# Altium PCB DS214SD.PcbDoc (part 2 of 2)
Units mm, origin at the board's own origin, x right, y up, seen from the top; angles counter-clockwise.
Board outline 549.66 x 200.53 mm, 2 copper layers (Top Layer, Bottom Layer); 205 components, 121 nets, 619 pads, 83 vias.
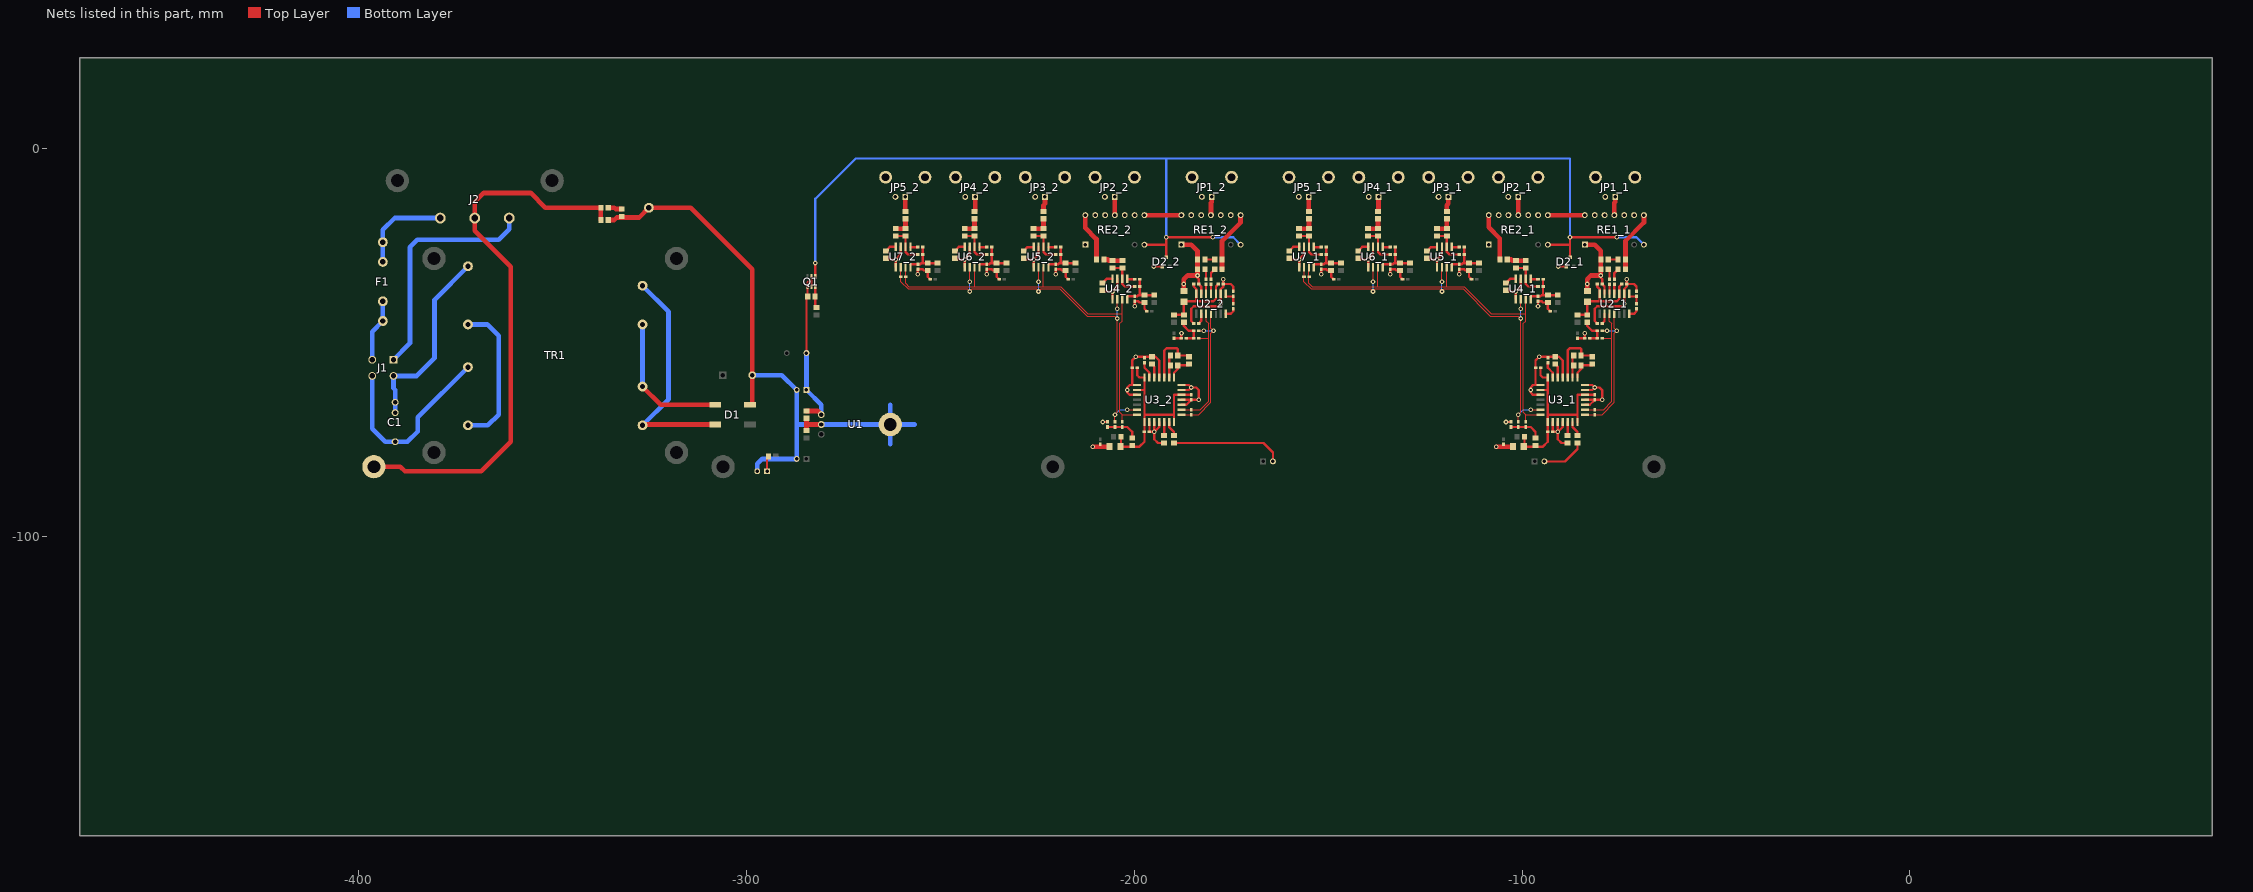
[diagram p2: the nets of this part, all layers, seen from the top]

## Via types
v1: diameter 1.2, hole 0.6, Top Layer to Bottom Layer, 83 vias

## Nets (pads, with @x,y where several pads share a name; then routed paths per layer and width w, separated by ;. In a path a pad name is that pad's centre, name@x,y a point inside that pad or via, vN(x,y) a via of type N, cw(c..) or ccw(c..) an arc to the next point about the centre after c; other vN are vias at no path point) (continued)
GND: C3.1 C4.1 C5.2 C6.2 C7.2 C8_1.1 C8_2.1 C9_1.1 C9_2.1 C11_1.1 C11_2.1 C12_1.1 C12_2.1 C13_1.1 C13_2.1 C14_1.1 C14_2.1 C15_1.1 C15_2.1 C16_1.1 C16_2.1 C17_1.1 C17_2.1 C18_1.1 C18_2.1 C19_1.1 C19_2.1 C20_1.1 C20_2.1 C21_1.1 C21_2.1 C22_1.1 C22_2.1 C23_1.1 C23_2.1 C24_1.1 C24_2.1 C25_1.1 C25_2.1 C26_1.1 C26_2.1 C27_1.1 C27_2.1 C28_1.1 C28_2.1 C32_1.2 C32_2.2 C33_1.2 C33_2.2 C35_1.1 C35_2.1 C36_1.1 C36_2.1 C37_1.1 C37_2.1 C38_1.1 C38_2.1 D1.2 D2_1.2 D2_2.2 J3.2 JP1_1.2 JP1_1.3 JP1_1.4 JP1_2.2 JP1_2.3 JP1_2.4 JP2_1.2 JP2_1.3 JP2_1.4 JP2_2.2 JP2_2.3 JP2_2.4 JP3_1.2 JP3_1.3 JP3_1.4 JP3_2.2 JP3_2.3 JP3_2.4 JP4_1.2 JP4_1.3 JP4_1.4 JP4_2.2 JP4_2.3 JP4_2.4 JP5_1.2 JP5_1.3 JP5_1.4 JP5_2.2 JP5_2.3 JP5_2.4 L2_1.2 L2_2.2 pad.1 R1.1 R2.1 R14_1.2 R14_2.2 R15_1.2 R15_2.2 R16_1.1 R16_2.1 R29_1.1 R29_2.1 R30_1.1 R30_2.1 R31_1.1 R31_2.1 R32_1.1 R32_2.1 RE1_1.1 RE1_1.9 RE1_1.10 RE1_1.12 RE1_1.13 RE1_2.1 RE1_2.9 RE1_2.10 RE1_2.12 RE1_2.13 RE2_1.1 RE2_1.9 RE2_1.10 RE2_1.12 RE2_1.13 RE2_2.1 RE2_2.9 RE2_2.10 RE2_2.12 RE2_2.13 U1.2 U1.4 U2_1.2 U2_1.6 U2_2.2 U2_2.6 U3_1.1 U3_1.7 U3_1.8 U3_1.10 U3_1.11 U3_1.15 U3_1.19 U3_1.21 U3_1.27 U3_1.28 U3_2.1 U3_2.7 U3_2.8 U3_2.10 U3_2.11 U3_2.15 U3_2.19 U3_2.21 U3_2.27 U3_2.28 U4_1.3 U4_1.5 U4_2.3 U4_2.5 U5_1.3 U5_1.5 U5_2.3 U5_2.5 U6_1.3 U6_1.5 U6_2.3 U6_2.5 U7_1.3 U7_1.5 U7_2.3 U7_2.5 | length 516.5
  Top Layer w0.6: R32_2.1@-264.02,-28.575 v1(-261.48,-28.575) ; U7_2.5@-261.48,-30.54 v1(-261.48,-28.575) ; U7_2.3@-260.21,-25.34 -260.21,-27.305 v1(-261.48,-28.575) ; v1(-255.765,-32.385) C23_2.1@-255.765,-31.13 -254.51,-31.13 -254.21,-31.43 C38_2.1@-253.225,-31.43 -253.225,-33.035 C27_2.1@-252.605,-33.655 ; R31_2.1@-246.24,-28.575 v1(-243.7,-28.575) ; U6_2.5@-243.7,-30.54 v1(-243.7,-28.575) ; U6_2.3@-242.43,-25.34 -242.43,-27.305 v1(-243.7,-28.575) ; v1(-237.985,-32.385) C22_2.1@-237.985,-31.13 -236.73,-31.13 -236.43,-31.43 C37_2.1@-235.445,-31.43 -235.445,-33.035 C26_2.1@-234.825,-33.655 ; R30_2.1@-228.46,-28.575 v1(-225.92,-28.575) ; U5_2.5@-225.92,-30.54 v1(-225.92,-28.575) ; U5_2.3@-224.65,-25.34 -224.65,-27.305 v1(-225.92,-28.575) ; v1(-220.205,-32.385) C21_2.1@-220.205,-31.13 -218.95,-31.13 -218.65,-31.43 C36_2.1@-217.665,-31.43 -217.665,-33.035 C25_2.1@-217.045,-33.655 ; v1(-208.14,-70.485) -208.125,-70.47 C16_2.1@-206.87,-70.47 ; R29_2.1@-208.14,-36.83 v1(-205.6,-36.83) ; U4_2.5@-205.6,-38.795 v1(-205.6,-36.83) ; U4_2.3@-204.33,-33.595 -204.33,-35.56 v1(-205.6,-36.83) ; -200.535,-60.945 -200.535,-54.625 v1(-199.57,-53.66) -194.485,-53.66 -193.535,-54.61 U3_2.15@-193.535,-59.02 ; v1(-199.885,-40.64) C20_2.1@-199.885,-39.385 -198.915,-39.385 -198.615,-39.685 C35_2.1@-197.345,-39.685 -197.345,-41.275 C24_2.1@-196.71,-41.91 ; U3_2.21@-199.285,-63.5 -201.155,-63.5 -201.79,-62.865 -201.79,-61.595 -201.155,-60.96 U3_2.19@-199.285,-60.96 ; U3_2.27@-196.06,-70.535 C18_2.1@-196.06,-73.025 v1(-194.805,-73.025) -193.535,-71.755 U3_2.1@-193.535,-70.52 ; v1(-194.945,-30.385) D2_2.2@-192.72,-30.385 ; U3_2.28@-194.805,-70.52 -194.805,-74.93 -193.855,-75.88 C28_2.1@-192.265,-75.88 ; C8_2.1@-189.71,-48.895 C14_2.1@-187.835,-48.895 -187.835,-47.64 v1(-187.82,-47.625) ; U3_2.7@-187.785,-66.04 -186.535,-66.04 C17_2.1@-185.28,-64.785 -183.39,-64.785 v1(-183.375,-64.77) -183.375,-62.23 -184.01,-61.595 v1(-185.28,-61.595) ; U3_2.8@-187.785,-64.77 C17_2.1@-185.295,-64.77 ; U3_2.10@-187.785,-62.23 -185.915,-62.23 v1(-185.28,-61.595) ; U3_2.11@-187.785,-60.96 -185.915,-60.96 v1(-185.28,-61.595) ; R16_2.1@-184.66,-45.085 -185.28,-44.465 -185.28,-41.275 -184.645,-40.64 -178.295,-40.64 v1(-177.66,-40.005) -177.66,-36.195 -177.01,-35.545 -177.01,-33.67 v1(-177.025,-33.655) ; v1(-183.69,-32.705) -183.69,-33.34 -183.36,-33.67 C11_2.1@-183.36,-34.925 -182.74,-35.545 U2_2.6@-182.74,-37.405 ; C12_2.1@-177.01,-34.925 -175.12,-34.925 -174.485,-35.56 C9_2.1@-174.485,-36.815 ; R32_1.1@-160.02,-28.575 v1(-157.48,-28.575) ; U7_1.5@-157.48,-30.54 v1(-157.48,-28.575) ; U7_1.3@-156.21,-25.34 -156.21,-27.305 v1(-157.48,-28.575) ; v1(-151.765,-32.385) C23_1.1@-151.765,-31.13 -150.51,-31.13 -150.21,-31.43 C38_1.1@-149.225,-31.43 -149.225,-33.035 C27_1.1@-148.605,-33.655 ; R31_1.1@-142.24,-28.575 v1(-139.7,-28.575) ; U6_1.5@-139.7,-30.54 v1(-139.7,-28.575) ; U6_1.3@-138.43,-25.34 -138.43,-27.305 v1(-139.7,-28.575) ; v1(-133.985,-32.385) C22_1.1@-133.985,-31.13 -132.73,-31.13 -132.43,-31.43 C37_1.1@-131.445,-31.43 -131.445,-33.035 C26_1.1@-130.825,-33.655 ; R30_1.1@-124.46,-28.575 v1(-121.92,-28.575) ; U5_1.5@-121.92,-30.54 v1(-121.92,-28.575) ; U5_1.3@-120.65,-25.34 -120.65,-27.305 v1(-121.92,-28.575) ; v1(-116.205,-32.385) C21_1.1@-116.205,-31.13 -114.95,-31.13 -114.65,-31.43 C36_1.1@-113.665,-31.43 -113.665,-33.035 C25_1.1@-113.045,-33.655 ; v1(-104.14,-70.485) -104.125,-70.47 C16_1.1@-102.87,-70.47 ; R29_1.1@-104.14,-36.83 v1(-101.6,-36.83) ; U4_1.5@-101.6,-38.795 v1(-101.6,-36.83) ; U4_1.3@-100.33,-33.595 -100.33,-35.56 v1(-101.6,-36.83) ; -96.535,-60.945 -96.535,-54.625 v1(-95.57,-53.66) -90.485,-53.66 -89.535,-54.61 U3_1.15@-89.535,-59.02 ; v1(-95.885,-40.64) C20_1.1@-95.885,-39.385 -94.915,-39.385 -94.615,-39.685 C35_1.1@-93.345,-39.685 -93.345,-41.275 C24_1.1@-92.71,-41.91 ; U3_1.21@-95.285,-63.5 -97.155,-63.5 -97.79,-62.865 -97.79,-61.595 -97.155,-60.96 U3_1.19@-95.285,-60.96 ; U3_1.27@-92.06,-70.535 C18_1.1@-92.06,-73.025 v1(-90.805,-73.025) -89.535,-71.755 U3_1.1@-89.535,-70.52 ; U3_1.28@-90.805,-70.52 -90.805,-74.93 -89.855,-75.88 C28_1.1@-88.265,-75.88 ; v1(-90.71,-30.385) D2_1.2@-88.58,-30.385 ; C8_1.1@-85.71,-48.895 C14_1.1@-83.835,-48.895 -83.835,-47.64 v1(-83.82,-47.625) ; U3_1.7@-83.785,-66.04 -82.535,-66.04 C17_1.1@-81.28,-64.785 -79.39,-64.785 v1(-79.375,-64.77) -79.375,-62.23 -80.01,-61.595 v1(-81.28,-61.595) ; U3_1.8@-83.785,-64.77 C17_1.1@-81.295,-64.77 ; U3_1.10@-83.785,-62.23 -81.915,-62.23 v1(-81.28,-61.595) ; U3_1.11@-83.785,-60.96 -81.915,-60.96 v1(-81.28,-61.595) ; R16_1.1@-80.66,-45.085 -81.28,-44.465 -81.28,-41.275 -80.645,-40.64 -74.295,-40.64 v1(-73.66,-40.005) -73.66,-36.195 -73.01,-35.545 -73.01,-33.67 v1(-73.025,-33.655) ; v1(-79.69,-32.705) -79.69,-33.34 -79.36,-33.67 C11_1.1@-79.36,-34.925 -78.74,-35.545 U2_1.6@-78.74,-37.405 ; C12_1.1@-73.01,-34.925 -71.12,-34.925 -70.485,-35.56 C9_1.1@-70.485,-36.815
  Top Layer w1.2: R1.1@-335.6,-18.415 -334.01,-18.415 -333.375,-17.78 -327.66,-17.78 pad.1@-325.12,-15.24 -314.325,-15.24 -298.45,-31.115 D1.2@-298.45,-66.04 ; C4.1@-284.48,-72.71 C3.1@-284.48,-69.53 ; -284.48,-71.12 U1.2@-280.67,-71.12 ; v1(-210.68,-76.835) C33_2.2@-206.365,-76.835 ; RE1_2.1@-187.82,-24.765 -185.28,-24.765 -183.69,-26.355 v1(-183.69,-32.705) -186.235,-32.705 -187.185,-33.655 C32_2.2@-187.185,-36.7 ; v1(-106.68,-76.835) C33_1.2@-102.365,-76.835 ; RE1_1.1@-83.82,-24.765 -81.28,-24.765 -79.69,-26.355 v1(-79.69,-32.705) -82.235,-32.705 -83.185,-33.655 C32_1.2@-83.185,-36.7
  Bottom Layer w1.2: C5.2@-298.45,-58.42 -290.83,-58.42 C6.2@-287.02,-62.23 C7.2@-287.02,-80.01 -295.91,-80.01 -297.18,-81.28 J3.2@-297.18,-83.185 ; -287.02,-71.12 -256.54,-71.12 ; -262.89,-76.2 -262.89,-66.04
  other v1: -201.79,-62.23 -97.79,-62.23 -187.185,-34.925 -83.185,-34.925
GNE: C2.2 J2.2 pad.0@-396,-82 R1.2 | length 142.8
  Top Layer w1.2: pad.0@-396,-82 -389.17,-82 -387.985,-83.185 -368.3,-83.185 -360.68,-75.565 -360.68,-30.48 -370,-21.16 -370,-13.765 -367.665,-11.43 -355.6,-11.43 -351.79,-15.24 C2.2@-337.5,-15.24 R1.2@-337.5,-18.415
NetC1_1: C1.1 J1.4 TR1.6 | length 49.8
  Bottom Layer w1.2: J1.4@-396.45,-58.615 -396.45,-72.18 -393.065,-75.565 -387.35,-75.565 -384.721,-72.936 -384.721,-69.311 TR1.6@-371.75,-56.34
NetC1_2: C1.2 J1.2 TR1.1 | length 49.3
  Bottom Layer w1.2: C1.2@-390.525,-68.065 -390.525,-62.23 -390.95,-61.805 J1.2@-390.95,-58.615 -385.005,-58.615 -380.365,-53.975 -380.365,-38.955 TR1.1@-371.75,-30.34
NetC2_1: C2.1 R2.2 | length 3.6
  Top Layer w1.2: C2.1@-335.6,-15.24 -334.01,-15.24 -333.69,-15.56 R2.2@-332.105,-15.56
NetC3_2: C3.2 C6.1 L1.2 Q1.1 Q1.2 Q1.5 R33.1 U1.1 | length 43.5
  Top Layer w0.6: L1.2@-284.48,-52.705 R33.1@-284.48,-38.1 ; R33.1@-284.21,-38.05 -284.21,-34.56 -283.94,-34.29 -283.21,-34.29 ; Q1.2@-283.21,-35.615 Q1.5@-283.21,-32.965
  Top Layer w1.2: C3.2@-284.48,-67.63 -281.62,-67.63 U1.1@-280.67,-68.58
  Bottom Layer w1.2: L1.2@-284.48,-52.705 C6.1@-284.48,-62.23 -280.67,-66.04 U1.1@-280.67,-68.58
NetC9_1_2: C9_1.2 C10_1.1 U2_1.1 | length 3.8
  Top Layer w0.6: U2_1.1@-72.375,-38.115 C9_1.2@-70.485,-38.115 C10_1.1@-70.485,-39.99
NetC9_2_2: C9_2.2 C10_2.1 U2_2.1 | length 3.8
  Top Layer w0.6: U2_2.1@-176.375,-38.115 C9_2.2@-174.485,-38.115 C10_2.1@-174.485,-39.99
NetC10_1_2: C10_1.2 U2_1.14 | length 2.8
  Top Layer w0.6: U2_1.14@-72.39,-42.605 -71.18,-42.605 -70.485,-41.91 C10_1.2@-70.485,-41.29
NetC10_2_2: C10_2.2 U2_2.14 | length 2.8
  Top Layer w0.6: U2_2.14@-176.39,-42.605 -175.18,-42.605 -174.485,-41.91 C10_2.2@-174.485,-41.29
NetC11_1_2: C11_1.2 C12_1.2 C32_1.1 D3_1.1 L3_1.2 U2_1.3 U2_1.7 | length 23.1
  Top Layer w0.6: L3_1.2@-85.725,-42.865 D3_1.1@-83.185,-42.865 C32_1.1@-83.185,-39.5 ; C32_1.1@-83.055,-39.37 -75.565,-39.37 -74.93,-38.735 -74.93,-35.545 C12_1.2@-74.31,-34.925 ; C11_1.2@-80.66,-34.925 -80.66,-35.545 -80.01,-36.195 -80.01,-39.37
NetC11_2_2: C11_2.2 C12_2.2 C32_2.1 D3_2.1 L3_2.2 U2_2.3 U2_2.7 | length 23.1
  Top Layer w0.6: L3_2.2@-189.725,-42.865 D3_2.1@-187.185,-42.865 C32_2.1@-187.185,-39.5 ; C32_2.1@-187.055,-39.37 -179.565,-39.37 -178.93,-38.735 -178.93,-35.545 C12_2.2@-178.31,-34.925 ; C11_2.2@-184.66,-34.925 -184.66,-35.545 -184.01,-36.195 -184.01,-39.37
NetC13_1_2: C13_1.2 U3_1.17 | length 4.3
  Top Layer w0.6: C13_1.2@-93.345,-55.26 -93.345,-56.515 -92.075,-57.785 U3_1.17@-92.075,-59.02
NetC13_2_2: C13_2.2 U3_2.17 | length 4.3
  Top Layer w0.6: C13_2.2@-197.345,-55.26 -197.345,-56.515 -196.075,-57.785 U3_2.17@-196.075,-59.02
NetC14_1_2: C14_1.2 D3_1.2 R17_1.1 R18_1.1 | length 7.8
  Top Layer w0.6: D3_1.2@-83.185,-44.765 -83.185,-45.72 -81.915,-46.99 R18_1.1@-80.66,-46.99 R17_1.1@-80.66,-48.895 C14_1.2@-82.535,-48.895
NetC14_2_2: C14_2.2 D3_2.2 R17_2.1 R18_2.1 | length 7.8
  Top Layer w0.6: D3_2.2@-187.185,-44.765 -187.185,-45.72 -185.915,-46.99 R18_2.1@-184.66,-46.99 R17_2.1@-184.66,-48.895 C14_2.2@-186.535,-48.895
NetC15_1_2: C15_1.2 C17_1.2 C18_1.2 C33_1.1 D4_1.1 L4_1.1 U3_1.4 U3_1.9 U3_1.18 U3_1.20 U3_1.26 | length 51.1
  Top Layer w0.6: C33_1.1@-99.565,-76.835 -94.645,-76.835 -93.36,-75.55 C18_1.2@-93.36,-73.025 ; C33_1.1@-99.38,-77.15 L4_1.1@-99.38,-74.295 ; U3_1.20@-95.285,-62.23 -93.345,-62.23 ; C15_1.2@-95.235,-56.515 -95.235,-58.435 -94.65,-59.02 U3_1.18@-93.345,-59.02 ; C18_1.2@-93.345,-73.01 U3_1.18@-93.345,-59.055 ; -93.345,-68.58 -85.725,-68.58 ; U3_1.4@-85.725,-70.52 -85.725,-63.5 C17_1.2@-81.295,-63.5
NetC15_2_2: C15_2.2 C17_2.2 C18_2.2 C33_2.1 D4_2.1 L4_2.1 U3_2.4 U3_2.9 U3_2.18 U3_2.20 U3_2.26 | length 51.1
  Top Layer w0.6: C33_2.1@-203.565,-76.835 -198.645,-76.835 -197.36,-75.55 C18_2.2@-197.36,-73.025 ; C33_2.1@-203.38,-77.15 L4_2.1@-203.38,-74.295 ; U3_2.20@-199.285,-62.23 -197.345,-62.23 ; C15_2.2@-199.235,-56.515 -199.235,-58.435 -198.65,-59.02 U3_2.18@-197.345,-59.02 ; C18_2.2@-197.345,-73.01 U3_2.18@-197.345,-59.055 ; -197.345,-68.58 -189.725,-68.58 ; U3_2.4@-189.725,-70.52 -189.725,-63.5 C17_2.2@-185.295,-63.5
NetC16_1_2: C16_1.2 D4_1.2 R19_1.1 R20_1.1 | length 8.5
  Top Layer w0.6: C16_1.2@-102.87,-71.77 -97.775,-71.77 -96.52,-73.025 D4_1.2@-96.52,-74.615
NetC16_2_2: C16_2.2 D4_2.2 R19_2.1 R20_2.1 | length 8.5
  Top Layer w0.6: C16_2.2@-206.87,-71.77 -201.775,-71.77 -200.52,-73.025 D4_2.2@-200.52,-74.615
NetC20_1_2: C20_1.2 C35_1.2 L5_1.2 R21_1.1 R25_1.1 U4_1.8 | length 11.2
  Top Layer w0.6: U4_1.8@-97.79,-38.1 -97.775,-38.085 -95.25,-38.085 -94.95,-37.785 C35_1.2@-93.345,-37.785 L5_1.2@-90.805,-37.785 ; -94.6,-37.785 R21_1.1@-94.6,-33.655
NetC20_2_2: C20_2.2 C35_2.2 L5_2.2 R21_2.1 R25_2.1 U4_2.8 | length 11.2
  Top Layer w0.6: U4_2.8@-201.79,-38.1 -201.775,-38.085 -199.25,-38.085 -198.95,-37.785 C35_2.2@-197.345,-37.785 L5_2.2@-194.805,-37.785 ; -198.6,-37.785 R21_2.1@-198.6,-33.655
NetC21_1_2: C21_1.2 C36_1.2 L6_1.2 R22_1.1 R26_1.1 U5_1.8 | length 11.2
  Top Layer w0.6: U5_1.8@-118.095,-29.83 -115.555,-29.83 -115.255,-29.53 L6_1.2@-111.125,-29.53 ; -114.92,-29.515 R22_1.1@-114.92,-25.4
NetC21_2_2: C21_2.2 C36_2.2 L6_2.2 R22_2.1 R26_2.1 U5_2.8 | length 11.2
  Top Layer w0.6: U5_2.8@-222.095,-29.83 -219.555,-29.83 -219.255,-29.53 L6_2.2@-215.125,-29.53 ; -218.92,-29.515 R22_2.1@-218.92,-25.4
NetC22_1_2: C22_1.2 C37_1.2 L7_1.2 R23_1.1 R27_1.1 U6_1.8 | length 11.3
  Top Layer w0.6: U6_1.8@-135.89,-29.845 -133.345,-29.845 -133.03,-29.53 L7_1.2@-128.905,-29.53 ; C22_1.2@-134,-29.845 C22_1.2@-133.985,-29.83 ; -132.7,-29.53 R23_1.1@-132.7,-25.4
NetC22_2_2: C22_2.2 C37_2.2 L7_2.2 R23_2.1 R27_2.1 U6_2.8 | length 11.3
  Top Layer w0.6: U6_2.8@-239.89,-29.845 -237.345,-29.845 -237.03,-29.53 L7_2.2@-232.905,-29.53 ; C22_2.2@-238,-29.845 C22_2.2@-237.985,-29.83 ; -236.7,-29.53 R23_2.1@-236.7,-25.4
NetC23_1_2: C23_1.2 C38_1.2 L8_1.2 R24_1.1 R28_1.1 U7_1.8 | length 11.2
  Top Layer w0.6: U7_1.8@-153.67,-29.845 -153.655,-29.83 -151.11,-29.83 -150.81,-29.53 L8_1.2@-146.685,-29.53 ; -150.48,-29.53 R24_1.1@-150.48,-25.4
NetC23_2_2: C23_2.2 C38_2.2 L8_2.2 R24_2.1 R28_2.1 U7_2.8 | length 11.2
  Top Layer w0.6: U7_2.8@-257.67,-29.845 -257.655,-29.83 -255.11,-29.83 -254.81,-29.53 L8_2.2@-250.685,-29.53 ; -254.48,-29.53 R24_2.1@-254.48,-25.4
NetC28_1_2: C28_1.2 U3_1.2 | length 3.5
  Top Layer w0.6: C28_1.2@-88.265,-73.98 U3_1.2@-88.265,-70.52
NetC28_2_2: C28_2.2 U3_2.2 | length 3.5
  Top Layer w0.6: C28_2.2@-192.265,-73.98 U3_2.2@-192.265,-70.52
NetC29_1_1: C29_1.1 R5_1.1 | length 2.9
  Top Layer w0.6: C29_1.1@-76.2,-33.64 -76.2,-32.07 R5_1.1@-75.245,-31.115
NetC29_1_2: C29_1.2 U2_1.4 | length 2.5
  Top Layer w0.6: U2_1.4@-76.2,-37.405 C29_1.2@-76.2,-34.94
NetC29_2_1: C29_2.1 R5_2.1 | length 2.9
  Top Layer w0.6: C29_2.1@-180.2,-33.64 -180.2,-32.07 R5_2.1@-179.245,-31.115
NetC29_2_2: C29_2.2 U2_2.4 | length 2.5
  Top Layer w0.6: U2_2.4@-180.2,-37.405 C29_2.2@-180.2,-34.94
NetC30_1_1: C30_1.1 R14_1.1 | length 2.5
  Top Layer w0.6: C30_1.1@-77.47,-33.64 R14_1.1@-77.47,-31.115
NetC30_1_2: C30_1.2 U2_1.5 | length 2.5
  Top Layer w0.6: U2_1.5@-77.47,-37.405 C30_1.2@-77.47,-34.94
NetC30_2_1: C30_2.1 R14_2.1 | length 2.5
  Top Layer w0.6: C30_2.1@-181.47,-33.64 R14_2.1@-181.47,-31.115
NetC30_2_2: C30_2.2 U2_2.5 | length 2.5
  Top Layer w0.6: U2_2.5@-181.47,-37.405 C30_2.2@-181.47,-34.94
NetC31_1_1: C31_1.1 R10_1.2 U3_1.12 | length 6.4
  Top Layer w0.6: U3_1.12@-85.725,-59.02 -85.725,-57.785 -84.775,-56.835 R10_1.2@-84.775,-55.88 C31_1.1@-81.915,-55.88
NetC31_1_2: C31_1.2 C34_1.2 U3_1.14 | length 15.3
  Top Layer w0.6: U3_1.14@-88.265,-59.02 -88.265,-52.07 -87.63,-51.435 -85.09,-51.435 -84.775,-51.75 C34_1.2@-84.775,-53.34 C31_1.2@-81.915,-53.34
NetC31_2_1: C31_2.1 R10_2.2 U3_2.12 | length 6.4
  Top Layer w0.6: U3_2.12@-189.725,-59.02 -189.725,-57.785 -188.775,-56.835 R10_2.2@-188.775,-55.88 C31_2.1@-185.915,-55.88
NetC31_2_2: C31_2.2 C34_2.2 U3_2.14 | length 15.3
  Top Layer w0.6: U3_2.14@-192.265,-59.02 -192.265,-52.07 -191.63,-51.435 -189.09,-51.435 -188.775,-51.75 C34_2.2@-188.775,-53.34 C31_2.2@-185.915,-53.34
NetC34_1_1: C34_1.1 R10_1.1 U3_1.13 | length 5.7
  Top Layer w0.6: U3_1.13@-86.995,-59.02 C34_1.1@-86.995,-53.34
NetC34_2_1: C34_2.1 R10_2.1 U3_2.13 | length 5.7
  Top Layer w0.6: U3_2.13@-190.995,-59.02 C34_2.1@-190.995,-53.34
NetC39_1_1: C39_1.1 RE2_1.14 | length 12.6
  Top Layer w1.2: RE2_1.14@-108.585,-17.145 -108.585,-20.32 -105.725,-23.18 C39_1.1@-105.725,-28.575
NetC39_1_2: C39_1.2 L9_1.2 R6_1.2 | length 4.9
  Top Layer w1.2: C39_1.2@-103.825,-28.575 -102.87,-28.575 -102.55,-28.895 R6_1.2@-99.06,-28.895
NetC39_2_1: C39_2.1 RE2_2.14 | length 12.6
  Top Layer w1.2: RE2_2.14@-212.585,-17.145 -212.585,-20.46 -209.725,-23.32 C39_2.1@-209.725,-28.575
NetC39_2_2: C39_2.2 L9_2.2 R6_2.2 | length 4.9
  Top Layer w1.2: C39_2.2@-207.825,-28.575 -206.87,-28.575 -206.55,-28.895 R6_2.2@-203.06,-28.895
NetC40_1_1: C40_1.1 JP3_1.1 | length 3.9
  Top Layer w1.2: C40_1.1@-119.38,-16.195 -119.38,-14.605 -119,-14.225 JP3_1.1@-119,-12.45
NetC40_1_2: C40_1.2 L10_1.2 R7_1.2 | length 5.1
  Top Layer w1.2: L10_1.2@-121.92,-20.64 R7_1.2@-119.38,-20.64 C40_1.2@-119.38,-18.095
NetC40_2_1: C40_2.1 JP3_2.1 | length 3.9
  Top Layer w1.2: C40_2.1@-223.38,-16.195 -223.38,-14.605 -223,-14.225 JP3_2.1@-223,-12.45
NetC40_2_2: C40_2.2 L10_2.2 R7_2.2 | length 5.1
  Top Layer w1.2: L10_2.2@-225.92,-20.64 R7_2.2@-223.38,-20.64 C40_2.2@-223.38,-18.095
NetC41_1_1: C41_1.1 JP4_1.1 | length 3.6
  Top Layer w1.2: C41_1.1@-137,-16.035 JP4_1.1@-137,-12.45
NetC41_1_2: C41_1.2 L11_1.2 R8_1.2 | length 5.1
  Top Layer w1.2: L11_1.2@-139.7,-20.64 R8_1.2@-137.16,-20.64 C41_1.2@-137.16,-18.095
NetC41_2_1: C41_2.1 JP4_2.1 | length 3.6
  Top Layer w1.2: C41_2.1@-241,-16.035 JP4_2.1@-241,-12.45
NetC41_2_2: C41_2.2 L11_2.2 R8_2.2 | length 5.1
  Top Layer w1.2: L11_2.2@-243.7,-20.64 R8_2.2@-241.16,-20.64 C41_2.2@-241.16,-18.095
NetC42_1_1: C42_1.1 JP5_1.1 | length 3.7
  Top Layer w1.2: C42_1.1@-155,-16.135 JP5_1.1@-155,-12.45
NetC42_1_2: C42_1.2 L12_1.2 R9_1.2 | length 5.1
  Top Layer w1.2: L12_1.2@-157.48,-20.64 R9_1.2@-154.94,-20.64 C42_1.2@-154.94,-18.095
NetC42_2_1: C42_2.1 JP5_2.1 | length 3.7
  Top Layer w1.2: C42_2.1@-259,-16.135 JP5_2.1@-259,-12.45
NetC42_2_2: C42_2.2 L12_2.2 R9_2.2 | length 5.1
  Top Layer w1.2: L12_2.2@-261.48,-20.64 R9_2.2@-258.94,-20.64 C42_2.2@-258.94,-18.095
NetD1_3: D1.3 TR1.14 TR1.17 | length 37.2
  Top Layer w1.2: TR1.14@-327.025,-61.595 TR1.14@-326.495,-61.595 ; TR1.14@-326.75,-61.34 -322.05,-66.04 D1.3@-308.03,-66.04
  Bottom Layer w1.2: TR1.14@-326.75,-61.34 TR1.17@-326.75,-45.34
NetD1_4: D1.4 TR1.12 TR1.19 | length 61.1
  Top Layer w1.2: TR1.12@-327.025,-71.12 D1.4@-307.975,-71.12
  Bottom Layer w1.2: TR1.12@-326.75,-70.845 TR1.12@-326.75,-71.34 -320.04,-64.63 -320.04,-42.05 TR1.19@-326.75,-35.34
NetF1_1: F1.1 J2.1 | length 24.3
  Bottom Layer w1.2: F1.1@-393.7,-29.21 -393.7,-20.955 -390.645,-17.9 J2.1@-378.89,-17.9
NetF1_2: F1.2 J1.3 | length 16.2
  Bottom Layer w1.2: J1.3@-396.45,-54.415 -396.45,-47.2 F1.2@-393.7,-44.45 F1.2@-393.7,-39.37
NetJ1_1: J1.1 J2.3 | length 61.4
  Bottom Layer w1.2: J1.1@-391.16,-54.61 -390.957,-54.408 -386.715,-50.165 -386.715,-25.4 -384.81,-23.495 -363.855,-23.495 -361.11,-20.75 J2.3@-361.11,-17.9
NetJ3_1: J3.1 R3.2 | length 3.8
  Top Layer w0.6: J3.1@-294.64,-83.185 R3.2@-294.64,-79.375
NetJ4_1_2: J4_1.2 R13_1.2 | length 11.4
  Top Layer w0.6: J4_1.2@-94.23,-80.645 -88.9,-80.645 -85.725,-77.47 R13_1.2@-85.725,-75.88
NetJ4_2_2: J4_2.2 R13_2.2 | length 28.8
  Top Layer w0.6: R13_2.2@-189.725,-75.88 -166.69,-75.88 -164.23,-78.34 J4_2.2@-164.23,-80.645
NetJP1_1_1: JP1_1.1 RE1_1.11 | length 4.8
  Top Layer w1.2: RE1_1.11@-76.2,-17.145 -76.2,-13.97 -76,-13.77 JP1_1.1@-76,-12.45
NetJP1_2_1: JP1_2.1 RE1_2.11 | length 4.8
  Top Layer w1.2: RE1_2.11@-180.2,-17.145 -180.2,-13.97 -180,-13.77 JP1_2.1@-180,-12.45
NetJP2_1_1: JP2_1.1 RE2_1.11 | length 4.7
  Top Layer w1.2: RE2_1.11@-101,-17.11 JP2_1.1@-101,-12.45
NetJP2_2_1: JP2_2.1 RE2_2.11 | length 4.7
  Top Layer w1.2: RE2_2.11@-205,-17.11 JP2_2.1@-205,-12.45
NetL2_1_1: L2_1.1 R4_1.1 | length 2.5
  Top Layer w0.6: L2_1.1@-77.79,-28.575 R4_1.1@-75.245,-28.575
NetL2_2_1: L2_2.1 R4_2.1 | length 2.5
  Top Layer w0.6: L2_2.1@-181.79,-28.575 R4_2.1@-179.245,-28.575
NetL9_1_1: L9_1.1 R6_1.1 R25_1.2 U4_1.2 | length 10.1
  Top Layer w0.6: L9_1.1@-101.6,-30.795 R6_1.1@-99.06,-30.795 -99.06,-34.925 -98.425,-35.56 R25_1.2@-95.9,-35.56
NetL9_2_1: L9_2.1 R6_2.1 R25_2.2 U4_2.2 | length 10.1
  Top Layer w0.6: L9_2.1@-205.6,-30.795 R6_2.1@-203.06,-30.795 -203.06,-34.925 -202.425,-35.56 R25_2.2@-199.9,-35.56
NetL10_1_1: L10_1.1 R7_1.1 R26_1.2 U5_1.2 | length 10.1
  Top Layer w0.6: L10_1.1@-121.92,-22.54 R7_1.1@-119.38,-22.54 -119.38,-26.67 -118.745,-27.305 R26_1.2@-116.22,-27.305
NetL10_2_1: L10_2.1 R7_2.1 R26_2.2 U5_2.2 | length 10.1
  Top Layer w0.6: L10_2.1@-225.92,-22.54 R7_2.1@-223.38,-22.54 -223.38,-26.67 -222.745,-27.305 R26_2.2@-220.22,-27.305
NetL11_1_1: L11_1.1 R8_1.1 R27_1.2 U6_1.2 | length 10.1
  Top Layer w0.6: L11_1.1@-139.7,-22.54 R8_1.1@-137.16,-22.54 -137.16,-26.67 -136.525,-27.305 R27_1.2@-134,-27.305
NetL11_2_1: L11_2.1 R8_2.1 R27_2.2 U6_2.2 | length 10.1
  Top Layer w0.6: L11_2.1@-243.7,-22.54 R8_2.1@-241.16,-22.54 -241.16,-26.67 -240.525,-27.305 R27_2.2@-238,-27.305
NetL12_1_1: L12_1.1 R9_1.1 R28_1.2 U7_1.2 | length 10.1
  Top Layer w0.6: L12_1.1@-157.48,-22.54 R9_1.1@-154.94,-22.54 -154.94,-26.67 -154.305,-27.305 R28_1.2@-151.78,-27.305
NetL12_2_1: L12_2.1 R9_2.1 R28_2.2 U7_2.2 | length 10.1
  Top Layer w0.6: L12_2.1@-261.48,-22.54 R9_2.1@-258.94,-22.54 -258.94,-26.67 -258.305,-27.305 R28_2.2@-255.78,-27.305
NetQ1_3: Q1.3 R33.2 R34.1 | length 5.3
  Top Layer w0.6: R34.1@-282.21,-40.91 Q1.3@-282.21,-35.615
NetR4_1_2: R4_1.2 R5_1.2 RE1_1.8 | length 15.9
  Top Layer w1.2: R5_1.2@-73.345,-31.115 -73.345,-23.815 -68.58,-19.05 RE1_1.8@-68.58,-17.145
NetR4_2_2: R4_2.2 R5_2.2 RE1_2.8 | length 15.9
  Top Layer w1.2: R5_2.2@-177.345,-31.115 -177.345,-23.815 -172.58,-19.05 RE1_2.8@-172.58,-17.145
NetR11_1_1: R11_1.1 R17_1.2 U2_1.10 U3_1.6 | length 33.2
  Top Layer w0.3: U3_1.6@-83.785,-67.31 -81.295,-67.31 R11_1.1@-81.28,-67.295 -81.265,-67.31 -78.954,-67.31 -76.835,-65.191 -76.835,-45.085 -77.47,-44.45 U2_1.10@-77.47,-42.605 ; R17_1.2@-79.36,-48.895 -76.835,-48.895
NetR11_1_2: R11_1.2 R18_1.2 U2_1.11 U3_1.5 | length 36
  Top Layer w0.3: U3_1.5@-83.785,-68.58 -81.295,-68.58 R11_1.2@-81.28,-68.595 -79.39,-68.595 -76.235,-65.44 -76.235,-47.66 v1(-75.565,-46.99) -76.2,-46.355 U2_1.11@-76.2,-42.605 ; R18_1.2@-79.36,-46.99 v1(-78.105,-46.99)
  Bottom Layer w0.3: v1(-78.105,-46.99) v1(-75.565,-46.99)
NetR11_2_1: R11_2.1 R17_2.2 U2_2.10 U3_2.6 | length 33.2
  Top Layer w0.3: U3_2.6@-187.785,-67.31 -185.295,-67.31 R11_2.1@-185.28,-67.295 -185.265,-67.31 -182.954,-67.31 -180.835,-65.191 -180.835,-45.085 -181.47,-44.45 U2_2.10@-181.47,-42.605 ; R17_2.2@-183.36,-48.895 -180.835,-48.895
NetR11_2_2: R11_2.2 R18_2.2 U2_2.11 U3_2.5 | length 36
  Top Layer w0.3: U3_2.5@-187.785,-68.58 -185.295,-68.58 R11_2.2@-185.28,-68.595 -183.39,-68.595 -180.235,-65.44 -180.235,-47.66 v1(-179.565,-46.99) -180.2,-46.355 U2_2.11@-180.2,-42.605 ; R18_2.2@-183.36,-46.99 v1(-182.105,-46.99)
  Bottom Layer w0.3: v1(-182.105,-46.99) v1(-179.565,-46.99)
NetR12_1_1: R12_1.1 R19_1.2 U3_1.24 U4_1.6 U5_1.6 U6_1.6 U7_1.6 | length 115.4
  Top Layer w0.3: R12_1.1@-156.225,-33.02 -156.225,-34.275 -154.305,-36.195 -139.065,-36.195 v1(-138.43,-36.83) -137.795,-36.195 -121.285,-36.195 v1(-120.65,-36.83) -120.015,-36.195 -115.149,-36.195 -108.164,-43.18 -100.965,-43.18 v1(-100.33,-43.815) -100.33,-67.945 v1(-100.965,-68.58) R19_1.2@-100.965,-70.47 ; R12_1.1@-156.21,-33.02 U7_1.6@-156.21,-30.54 ; v1(-138.43,-34.29) U6_1.6@-138.43,-30.54 ; v1(-120.65,-34.29) U5_1.6@-120.65,-30.54 ; v1(-100.33,-41.275) U4_1.6@-100.33,-38.795 ; v1(-97.79,-67.31) U3_1.24@-95.285,-67.31
  Bottom Layer w0.3: v1(-138.43,-36.83) v1(-138.43,-34.29) ; v1(-120.65,-36.83) v1(-120.65,-34.29) ; v1(-100.965,-68.58) -99.695,-67.31 v1(-97.79,-67.31) ; v1(-100.33,-43.815) v1(-100.33,-41.275)
NetR12_1_2: R12_1.2 R20_1.2 U3_1.25 U4_1.7 U5_1.7 U6_1.7 U7_1.7 | length 109.3
  Top Layer w0.3: U7_1.7@-154.94,-30.54 -154.94,-34.711 -154.091,-35.56 -114.935,-35.56 -107.95,-42.545 -99.06,-42.545 ; -137.16,-35.56 U6_1.7@-137.16,-30.54 ; -119.38,-35.56 U5_1.7@-119.38,-30.54 ; R20_1.2@-99.06,-70.47 -99.06,-68.58 ; U4_1.7@-99.06,-38.795 -99.06,-44.45 -99.695,-45.085 -99.695,-67.945 -99.06,-68.58 ; U3_1.25@-95.285,-68.58 -99.06,-68.58
NetR12_2_1: R12_2.1 R19_2.2 U3_2.24 U4_2.6 U5_2.6 U6_2.6 U7_2.6 | length 115.4
  Top Layer w0.3: R12_2.1@-260.225,-33.02 -260.225,-34.275 -258.305,-36.195 -243.065,-36.195 v1(-242.43,-36.83) -241.795,-36.195 -225.285,-36.195 v1(-224.65,-36.83) -224.015,-36.195 -219.149,-36.195 -212.164,-43.18 -204.965,-43.18 v1(-204.33,-43.815) -204.33,-67.945 v1(-204.965,-68.58) R19_2.2@-204.965,-70.47 ; R12_2.1@-260.21,-33.02 U7_2.6@-260.21,-30.54 ; v1(-242.43,-34.29) U6_2.6@-242.43,-30.54 ; v1(-224.65,-34.29) U5_2.6@-224.65,-30.54 ; v1(-204.33,-41.275) U4_2.6@-204.33,-38.795 ; v1(-201.79,-67.31) U3_2.24@-199.285,-67.31
  Bottom Layer w0.3: v1(-242.43,-36.83) v1(-242.43,-34.29) ; v1(-224.65,-36.83) v1(-224.65,-34.29) ; v1(-204.965,-68.58) -203.695,-67.31 v1(-201.79,-67.31) ; v1(-204.33,-43.815) v1(-204.33,-41.275)
NetR12_2_2: R12_2.2 R20_2.2 U3_2.25 U4_2.7 U5_2.7 U6_2.7 U7_2.7 | length 109.3
  Top Layer w0.3: U7_2.7@-258.94,-30.54 -258.94,-34.711 -258.091,-35.56 -218.935,-35.56 -211.95,-42.545 -203.06,-42.545 ; -241.16,-35.56 U6_2.7@-241.16,-30.54 ; -223.38,-35.56 U5_2.7@-223.38,-30.54 ; R20_2.2@-203.06,-70.47 -203.06,-68.58 ; U4_2.7@-203.06,-38.795 -203.06,-44.45 -203.695,-45.085 -203.695,-67.945 -203.06,-68.58 ; U3_2.25@-199.285,-68.58 -203.06,-68.58
NetR13_1_1: R13_1.1 U3_1.3 | length 4
  Top Layer w0.6: U3_1.3@-86.995,-70.52 -86.995,-71.755 -85.725,-73.025 R13_1.1@-85.725,-73.98
NetR13_2_1: R13_2.1 U3_2.3 | length 4
  Top Layer w0.6: U3_2.3@-190.995,-70.52 -190.995,-71.755 -189.725,-73.025 R13_2.1@-189.725,-73.98
NetR15_1_1: R15_1.1 U3_1.16 | length 3.7
  Top Layer w0.6: R15_1.1@-91.44,-55.56 -90.805,-56.195 U3_1.16@-90.805,-59.02
NetR15_2_1: R15_2.1 U3_2.16 | length 3.7
  Top Layer w0.6: R15_2.1@-195.44,-55.56 -194.805,-56.195 U3_2.16@-194.805,-59.02
NetR16_1_2: R16_1.2 U2_1.9 | length 2.7
  Top Layer w0.6: R16_1.2@-79.36,-45.085 -78.74,-44.465 U2_1.9@-78.74,-42.605
NetR16_2_2: R16_2.2 U2_2.9 | length 2.7
  Top Layer w0.6: R16_2.2@-183.36,-45.085 -182.74,-44.465 U2_2.9@-182.74,-42.605
NetR21_1_2: R21_1.2 U4_1.1 | length 1.8
  Top Layer w0.6: U4_1.1@-97.73,-33.655 R21_1.2@-95.9,-33.655
NetR21_2_2: R21_2.2 U4_2.1 | length 1.8
  Top Layer w0.6: U4_2.1@-201.73,-33.655 R21_2.2@-199.9,-33.655
NetR22_1_2: R22_1.2 U5_1.1 | length 1.8
  Top Layer w0.6: U5_1.1@-118.05,-25.4 R22_1.2@-116.22,-25.4
NetR22_2_2: R22_2.2 U5_2.1 | length 1.8
  Top Layer w0.6: U5_2.1@-222.05,-25.4 R22_2.2@-220.22,-25.4
NetR23_1_2: R23_1.2 U6_1.1 | length 1.8
  Top Layer w0.6: U6_1.1@-135.83,-25.4 R23_1.2@-134,-25.4
NetR23_2_2: R23_2.2 U6_2.1 | length 1.8
  Top Layer w0.6: U6_2.1@-239.83,-25.4 R23_2.2@-238,-25.4
NetR24_1_2: R24_1.2 U7_1.1 | length 1.8
  Top Layer w0.6: U7_1.1@-153.61,-25.4 R24_1.2@-151.78,-25.4
NetR24_2_2: R24_2.2 U7_2.1 | length 1.8
  Top Layer w0.6: U7_2.1@-257.61,-25.4 R24_2.2@-255.78,-25.4
NetR29_1_2: R29_1.2 U4_1.4 | length 3
  Top Layer w0.6: R29_1.2@-104.14,-34.61 -103.125,-33.595 U4_1.4@-101.6,-33.595
NetR29_2_2: R29_2.2 U4_2.4 | length 3
  Top Layer w0.6: R29_2.2@-208.14,-34.61 -207.125,-33.595 U4_2.4@-205.6,-33.595
NetR30_1_2: R30_1.2 U5_1.4 | length 2.9
  Top Layer w0.6: R30_1.2@-124.46,-26.355 -123.505,-25.4 U5_1.4@-121.92,-25.4
NetR30_2_2: R30_2.2 U5_2.4 | length 2.9
  Top Layer w0.6: R30_2.2@-228.46,-26.355 -227.505,-25.4 U5_2.4@-225.92,-25.4
NetR31_1_2: R31_1.2 U6_1.4 | length 3
  Top Layer w0.6: R31_1.2@-142.24,-26.355 -141.225,-25.34 U6_1.4@-139.7,-25.34
NetR31_2_2: R31_2.2 U6_2.4 | length 3
  Top Layer w0.6: R31_2.2@-246.24,-26.355 -245.225,-25.34 U6_2.4@-243.7,-25.34
NetR32_1_2: R32_1.2 U7_1.4 | length 3
  Top Layer w0.6: R32_1.2@-160.02,-26.355 -159.005,-25.34 U7_1.4@-157.48,-25.34
NetR32_2_2: R32_2.2 U7_2.4 | length 3
  Top Layer w0.6: R32_2.2@-264.02,-26.355 -263.005,-25.34 U7_2.4@-261.48,-25.34
NetRE1_1_14: RE1_1.14 RE2_1.8 | length 9.5
  Top Layer w1.2: RE2_1.8@-93.345,-17.145 RE1_1.14@-83.82,-17.145
NetRE1_2_14: RE1_2.14 RE2_2.8 | length 9.5
  Top Layer w1.2: RE2_2.8@-197.345,-17.145 RE1_2.14@-187.82,-17.145
NetTR1_4: TR1.4 TR1.9 | length 38.5
  Bottom Layer w1.2: TR1.9@-371.75,-71.34 -366.615,-71.34 -363.855,-68.58 -363.855,-48.26 -366.775,-45.34 TR1.4@-371.75,-45.34
REL: D2_1.1 D2_2.1 Q1.4 RE1_1.7 RE1_2.7 RE2_1.7 RE2_2.7 | length 321
  Top Layer w0.6: Q1.4@-282.21,-32.965 v1(-282.21,-29.48) ; RE2_2.7@-197.345,-24.765 -191.77,-24.765 ; D2_2.1@-191.77,-28.035 v1(-191.77,-22.86) v1(-179.705,-22.86) ; RE2_1.7@-93.345,-24.765 -87.63,-24.765 ; D2_1.1@-87.63,-28.035 v1(-87.63,-22.86) v1(-75.565,-22.86)
  Bottom Layer w0.6: v1(-282.21,-29.48) -282.21,-12.97 -271.78,-2.54 -87.63,-2.54 v1(-87.63,-22.86) ; v1(-191.77,-22.86) -191.77,-2.54 ; v1(-179.705,-22.86) -174.485,-22.86 RE1_2.7@-172.58,-24.765 ; v1(-75.565,-22.86) -70.485,-22.86 RE1_1.7@-68.58,-24.765
pads on no net: D2_1.3 D2_2.3 J2.4 J2.5 Q1.6 RE1_1.6 RE1_2.6 RE2_1.6 RE2_2.6 TR1.20 TR1.21 TR1.22 TR1.23 U2_1.8 U2_1.12 U2_1.13 U2_2.8 U2_2.12 U2_2.13 U3_1.22 U3_1.23 U3_2.22 U3_2.23

## Polygon pours and split planes (outlines as drawn)
NetC15_1_2 on Top Layer (hatched 90Degree grid 0.6 track 0.6, remove dead copper): -93.345,-60.96 -85.725,-60.96 -85.725,-68.58 -93.345,-68.58
NetC15_2_2 on Top Layer (hatched 90Degree grid 0.6 track 0.6, remove dead copper): -197.345,-60.96 -189.23,-60.96 -189.23,-68.58 -197.345,-68.58
GND on Top Layer (hatched 90Degree grid 0.6 track 0.6, remove dead copper): -66.04,-2.54 -66.04,-20.32 -110.49,-20.32 -110.49,-2.54
GND on Top Layer (hatched 90Degree grid 0.6 track 0.6, remove dead copper): -170.18,-20.32 -170.18,-2.54 -214.63,-2.54 -214.63,-20.32
GND on Bottom Layer (hatched 90Degree grid 0.6 track 0.6, remove dead copper): -269.24,-83.82 -269.24,-3.81 -63.5,-3.81 -63.5,-77.47 -70.485,-77.47 -70.485,-83.82

## Keep-outs
Keep-Out Layer:
  lines w0.3: -191.77,-40.005 -191.77,-23.495 ; -167.005,-43.18 -167.005,-3.81 ; -87.63,-40.005 -87.63,-23.495 ; -262.001,-22.987 -258.445,-22.987 -258.445,-15.748 -259.461,-15.748 -259.461,-20.193 -262.001,-20.193 -262.001,-22.987 ; -260.477,-33.147 -258.699,-33.147 -258.699,-32.893 -260.477,-32.893 -260.477,-33.147 ; -256.032,-27.432 -254.254,-27.432 -254.254,-25.273 -256.032,-25.273 -256.032,-27.432 ; -244.221,-22.987 -240.665,-22.987 -240.665,-15.748 -241.681,-15.748 -241.681,-20.193 -244.221,-20.193 -244.221,-22.987 ; -238.252,-27.432 -236.474,-27.432 -236.474,-25.273 -238.252,-25.273 -238.252,-27.432 ; -226.441,-22.987 -222.885,-22.987 -222.885,-15.748 -223.901,-15.748 -223.901,-20.193 -226.441,-20.193 -226.441,-22.987 ; -220.472,-27.432 -218.694,-27.432 -218.694,-25.273 -220.472,-25.273 -220.472,-27.432 ; -210.185,-29.21 -206.248,-29.21 -206.248,-31.242 -202.438,-31.242 -202.438,-28.067 -210.185,-28.067 -210.185,-29.21 ; -205.105,-72.009 -202.946,-72.009 -202.946,-70.231 -205.105,-70.231 -205.105,-72.009 ; -200.152,-35.687 -198.374,-35.687 -198.374,-33.528 -200.152,-33.528 -200.152,-35.687 ; -197.485,-55.499 -196.342,-55.499 -196.342,-56.007 -194.818,-56.007 -194.818,-53.213 -196.342,-53.213 -196.342,-53.721 -197.485,-53.721 -197.485,-55.499 ; -191.135,-56.388 -185.293,-56.388 -185.293,-52.832 -191.135,-52.832 -191.135,-56.388 ; -185.42,-68.834 -185.166,-68.834 -185.166,-67.056 -185.42,-67.056 -185.42,-68.834 ; -184.912,-49.022 -183.134,-49.022 -183.134,-46.863 -184.912,-46.863 -184.912,-49.022 ; -157.988,-22.987 -154.432,-22.987 -154.432,-15.748 -155.448,-15.748 -155.448,-20.193 -157.988,-20.193 -157.988,-22.987 ; -156.464,-33.147 -154.686,-33.147 -154.686,-32.893 -156.464,-32.893 -156.464,-33.147 ; -152.019,-27.432 -150.241,-27.432 -150.241,-25.273 -152.019,-25.273 -152.019,-27.432 ; -140.208,-22.987 -136.652,-22.987 -136.652,-15.748 -137.668,-15.748 -137.668,-20.193 -140.208,-20.193 -140.208,-22.987 ; -134.239,-27.432 -132.461,-27.432 -132.461,-25.273 -134.239,-25.273 -134.239,-27.432 ; -122.428,-22.987 -118.872,-22.987 -118.872,-15.748 -119.888,-15.748 -119.888,-20.193 -122.428,-20.193 -122.428,-22.987 ; -116.459,-27.432 -114.681,-27.432 -114.681,-25.273 -116.459,-25.273 -116.459,-27.432 ; -106.172,-29.083 -102.108,-29.083 -102.108,-31.242 -98.552,-31.242 -98.552,-28.067 -106.172,-28.067 -106.172,-29.083 ; -101.092,-72.009 -98.933,-72.009 -98.933,-70.231 -101.092,-70.231 -101.092,-72.009 ; -96.139,-35.687 -94.361,-35.687 -94.361,-33.528 -96.139,-33.528 -96.139,-35.687 ; -93.599,-55.626 -92.202,-55.626 -92.202,-56.007 -90.805,-56.007 -90.805,-53.213 -92.202,-53.213 -92.202,-53.721 -93.599,-53.721 -93.599,-55.626 ; -87.122,-56.388 -81.407,-56.388 -81.407,-52.832 -87.122,-52.832 -87.122,-56.388 ; -81.407,-68.834 -81.153,-68.834 -81.153,-67.056 -81.407,-67.056 -81.407,-68.834 ; -80.899,-49.022 -79.121,-49.022 -79.121,-46.863 -80.899,-46.863 -80.899,-49.022

## Other copper
Top Layer:
  text "DS214SD Ver.4  Name:D214D4 L1" at -328.295,-5.715 h1.5
  text "GND" at -327.66,-12.7 h2
  text "1A" at -394.97,-19.05 h2
Bottom Layer:
  text "DS214SD Ver.4  Name:D214D4 L2" at -287.02,-7.62 h1.5

## Silkscreen, mask and mechanical layers (free items; w line width, h text height)
Mechanical 1:
  lines w0.3: -399.5,-85.5 -399.5,-1 -62.5,-1 -62.5,-85.5 -399.5,-85.5
Mechanical 4:
  circle w0.2: c-26,-82 r1.5
  circle w0.2: c-34,-82 r1.5
  circle w0.2: c-44,-82 r1.5
  circle w0.2: c-56,-82 r1.5
  circle w0.2: c-66,-82 r1.5
  circle w0.2: c-86,-82 r1.5
  circle w0.2: c-201,-82 r1.5
  circle w0.2: c-221,-82 r1.5
  circle w0.2: c-306,-82 r1.5
  circle w0.2: c-346,-82 r1.5
  circle w0.2: c-326,-82 r1.5
  circle w0.2: c-376,-82 r1.5
  circle w0.2: c-396,-82 r1.5
  circle w0.2: c-416,-82 r1.5
  circle w0.2: c-215,-6 r1.5
  circle w0.2: c-85,-6 r1.5
  circle w0.2: c-345,-6 r1.5
  circle w0.2: c-405,-62 r1.5
  circle w0.2: c-405,-102 r1.5
  circle w0.2: c-328,-62 r1.5
  circle w0.2: c-328,-102 r1.5
  circle w0.2: c-184,-62 r1.5
  circle w0.2: c-184,-102 r1.5
  circle w0.2: c-64,-62 r1.5
  circle w0.2: c-64,-102 r1.5
  circle w0.2: c-21,-102 r1.5
  lines w0.2: -433.683,-90 -423.396,-90 ; -433.556,-30 -423.269,-30 ; -402.429,-121.07 -402.429,-123.165 -374.87,-123.165 -374.87,-121.07 ; -399.508,-118.07 -399.508,-108.052 -377.41,-108.052 -377.41,-118.07 ; -398.619,-123.165 -398.619,-125.705 -398.619,-125.959 -378.807,-125.959 -378.807,-123.165 ; -396.714,-108.052 -396.714,-96.876 -395.317,-95.479 -395.317,-88.113 -393.92,-88.113 -393.92,-95.479 -392.396,-97.003 -392.396,-108.052 ; -388.551,-130.15 -388.5,-95.479 ; -384.395,-107.925 -384.395,-96.749 -382.998,-95.352 -382.998,-87.986 -381.601,-87.986 -381.601,-95.352 -380.077,-96.876 -380.077,-107.925 ; -361,-121.12 ccw(c-359.5,-121.12) -358,-121.12 ; -360.404,-118.12 -360.404,-112.674 -360.023,-112.293 -359.134,-112.293 -358.753,-112.674 -358.753,-117.993 ; -6.709,-90 3.578,-90 ; -6.709,-30 3.578,-30
  lines w0.508: -430,-97.917 -429.111,-97.917 -429.111,-81.915 -430,-81.915 ; -430,-37.973 -429.111,-37.973 -429.111,-22.098 -430,-22.098 ; -429.111,-93.091 -426.825,-93.091 -426.825,-86.995 -429.111,-86.995 ; -429.111,-33.02 -426.825,-33.02 -426.825,-27.051 -429.111,-27.051 ; -1.248,-27.051 -3.534,-27.051 -3.534,-33.02 -0.994,-33.02 ; -0.994,-93.091 -3.534,-93.091 -3.534,-86.995 -0.994,-86.995 ; 0,-97.917 -0.994,-97.917 -0.994,-82.042 0,-82.042 ; 0,-38.1 -0.994,-38.1 -0.994,-21.971 0,-21.971 ; -456.5,-121 26.5,-121 26.5,-118 -456.5,-118 -456.5,-121 ; -430,-118 0,-118 0,0 -430,0 -430,-118
  text "DS+1" at -451,-114 h4

## Dimensions
-62.5,-85.5 to -399.5,-85.5 on Mechanical 2
-62.5,-85.5 to -62.5,-1 on Mechanical 2
-95.5,-82 to -165.5,-80.5 on Mechanical 2
-95.5,-82 to 0,-118 on Mechanical 2
-241,-12.45 to -259,-12.45 on Mechanical 2
-223,-12.45 to -241,-12.45 on Mechanical 2
-205,-12.45 to -223,-12.45 on Mechanical 2
-180,-12.45 to -205,-12.45 on Mechanical 2
-155,-12.45 to -180,-12.45 on Mechanical 2
-137,-12.45 to -155,-12.45 on Mechanical 2
-119,-12.45 to -137,-12.45 on Mechanical 2
-76,-12.45 to 0,0 on Mechanical 2
-101,-12.45 to -119,-12.45 on Mechanical 2
-76,-12.45 to -101,-12.45 on Mechanical 2